# Altium PCB RD15002_SingleSCT.PcbDoc
Units mil, origin at the board's own origin, x right, y up, seen from the top; angles counter-clockwise.
Board outline 2050 x 3175 mil, 2 copper layers (Top Layer, Bottom Layer); 201 components, 164 nets, 627 pads, 0 vias.
Unrouted connection lines stored in the file: 407.
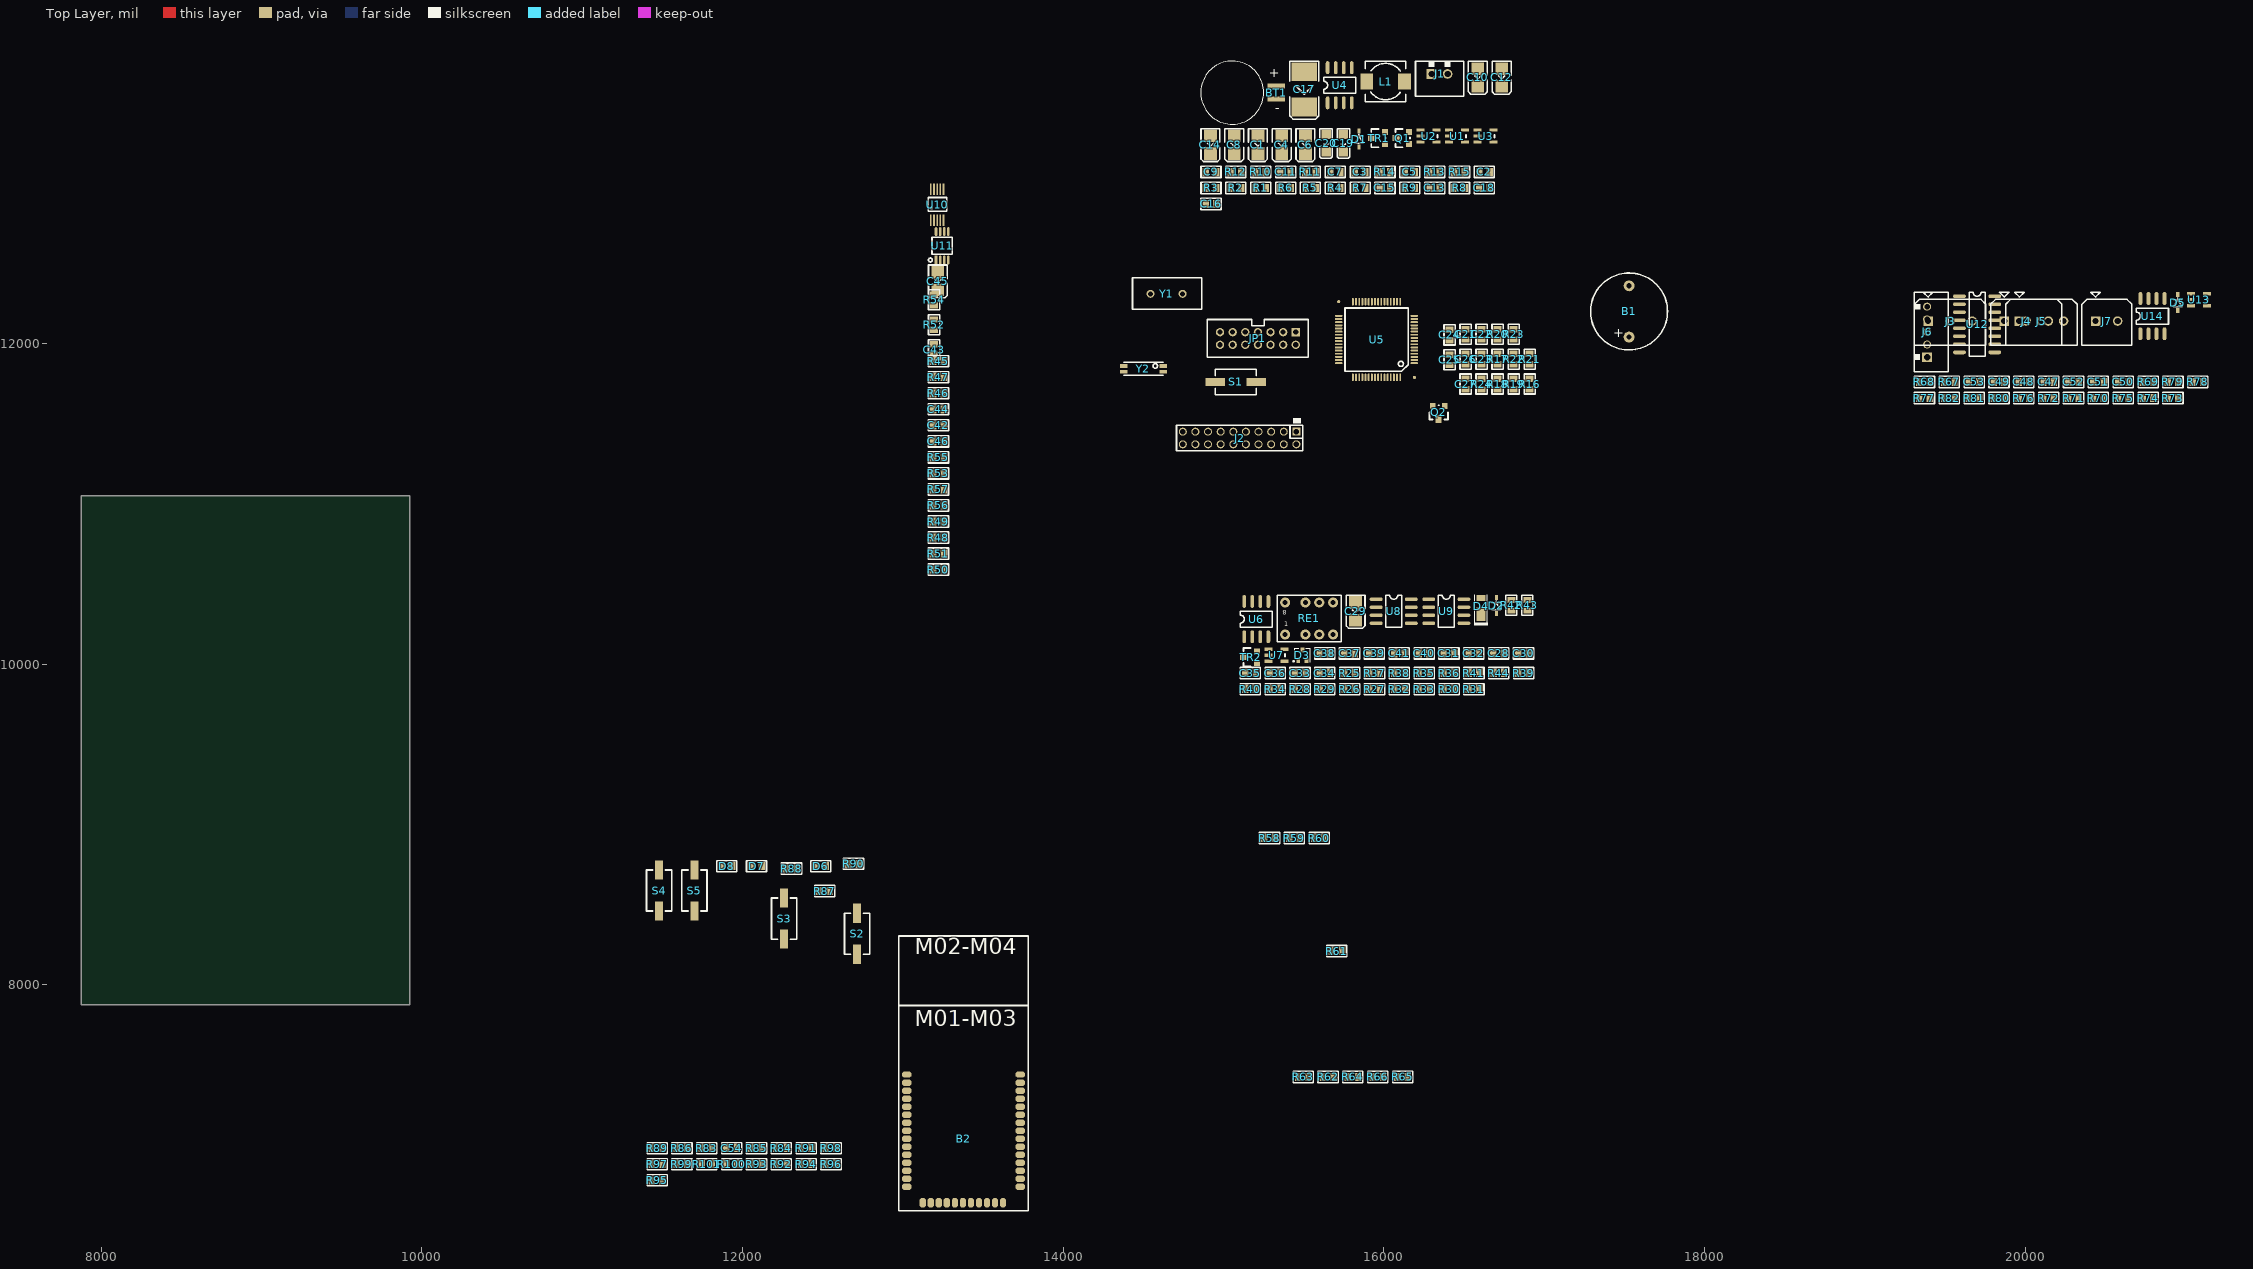
[diagram p0: Top Layer view]
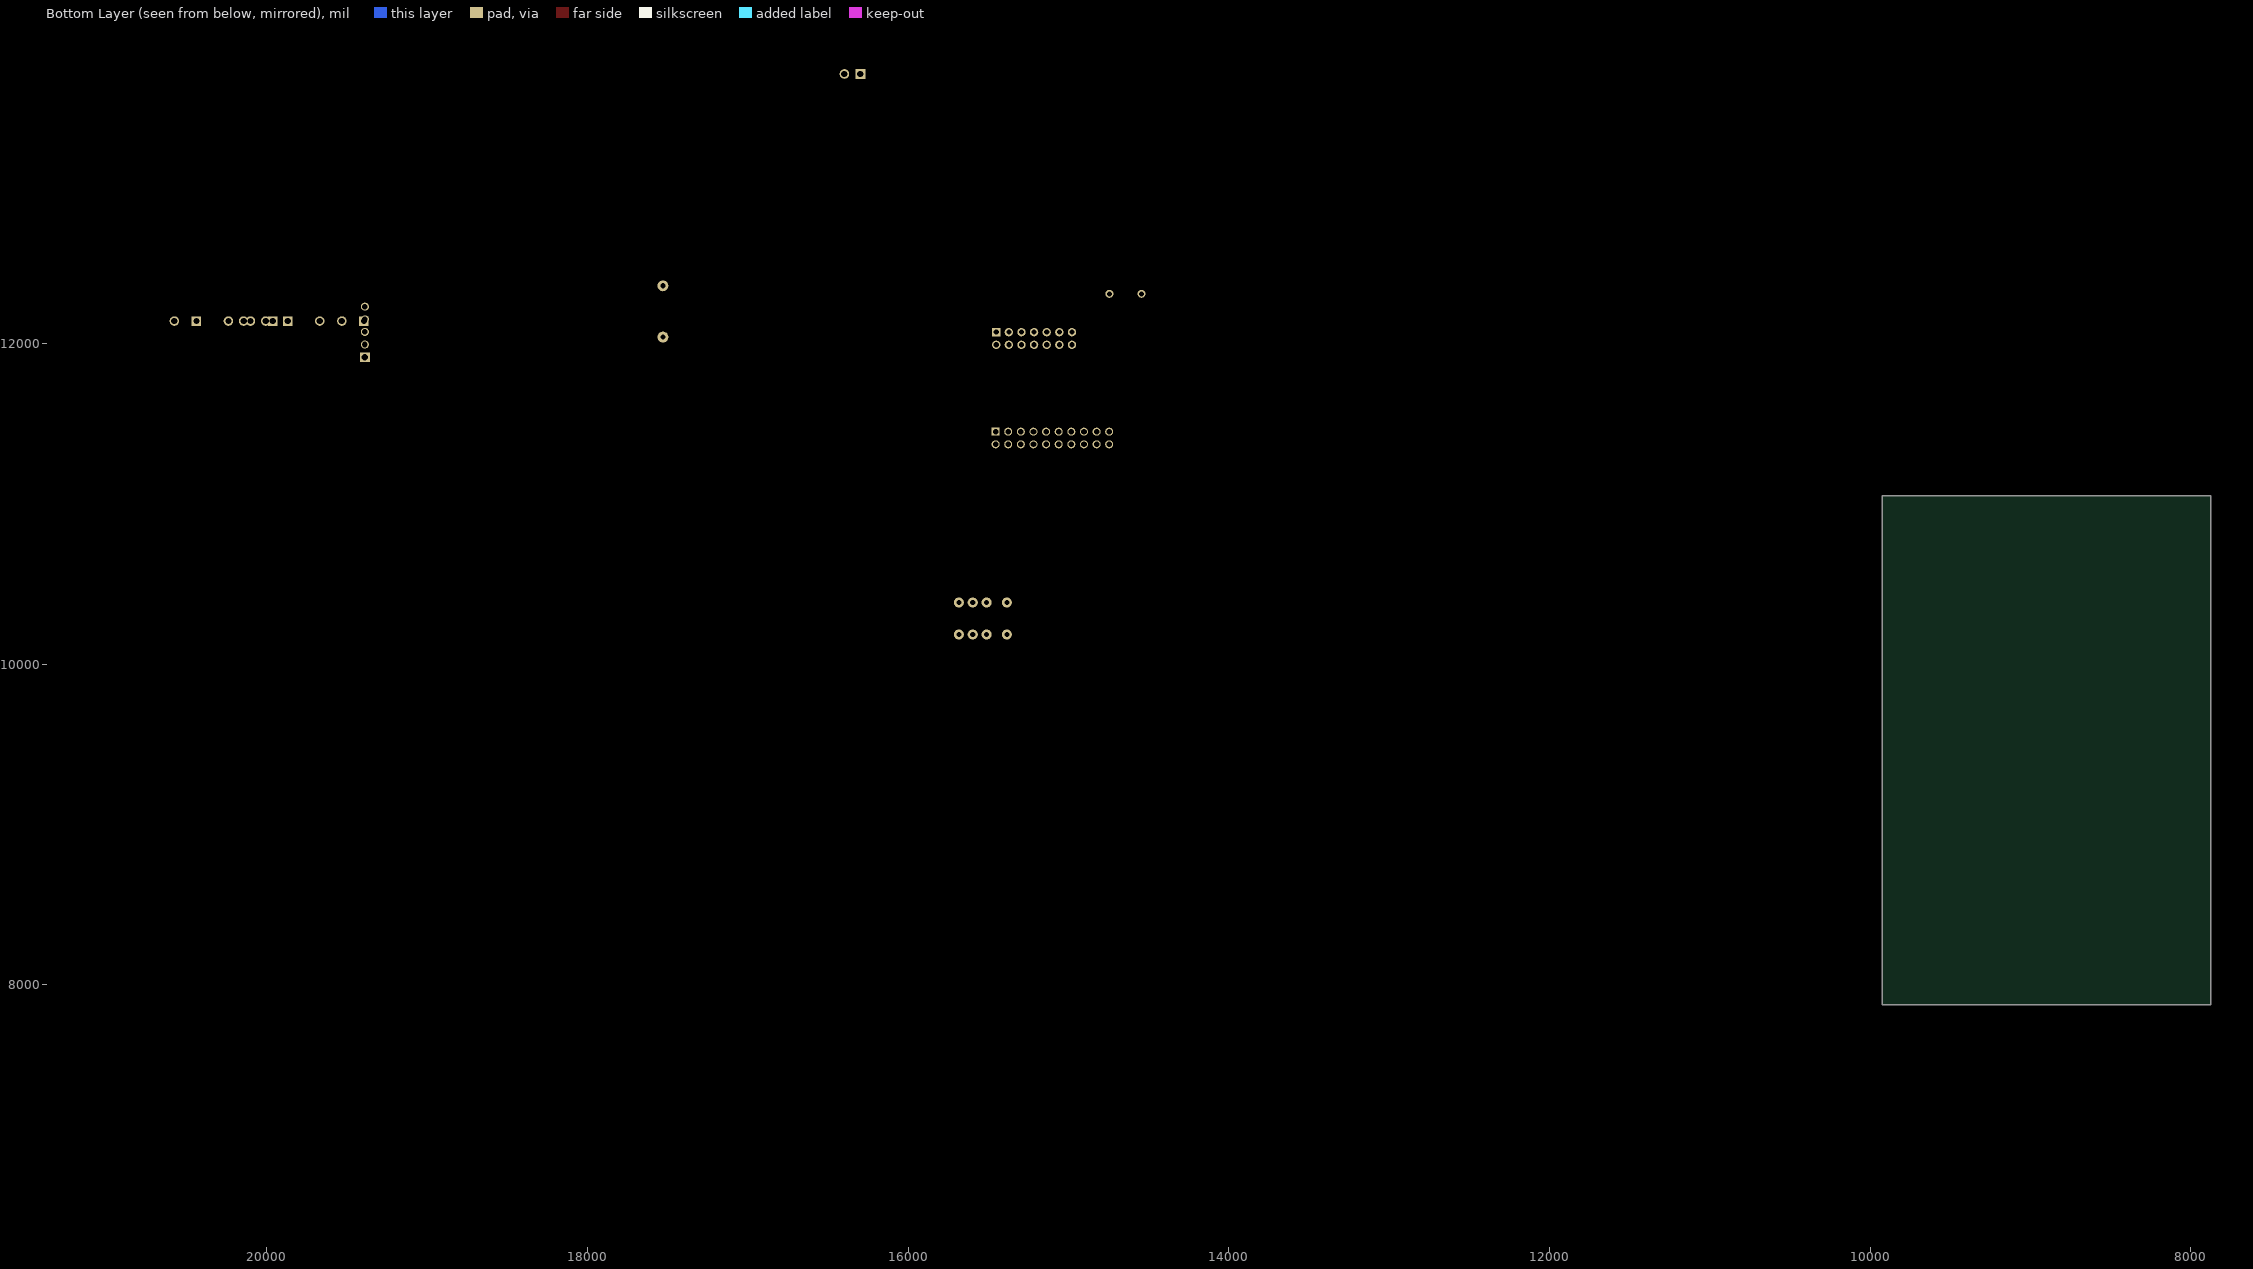
[diagram p1: Bottom Layer view, seen from below]

## Layer stack, top to bottom
Top Layer: signal copper 1.4
Dielectric: dielectric 12.6, FR-4, Dk 4.8
Bottom Layer: signal copper 1.4

## Board outline
7875,7875 9925,7875 9925,11050 7875,11050 7875,7875

## Design rules (kind name [scope] priority, off if disabled: settings)
Clearance [All] p1: gap=10
PolygonConnect [All] p1: connectstyle=Relief reliefconductorwidth=10 reliefentries=4 polygonreliefangle="90 Angle" airgapwidth=10
RoutingVias [All] p1: holewidth=28 width=50 viastyle="Through Hole" minholewidth=28 minwidth=50 maxholewidth=28 maxwidth=50
SolderMaskExpansion [All] p1: expansion=4
Width [All] p1: maxlimit=10 minlimit=10 preferedwidth=10
28 further rules are at their usual default settings.

## Classes and differential pairs
component class U_9-ZIGBEE: B2 C54 D6 D7 D8 R83 R84 R85 R86 R87 R88 R89 R90 R91 R92 R93 R94 R95 R96 R97 R98 R99 R100 R101 S2 S3 S4 S5
component class U_8-PORT: C47 C48 C49 C50 C51 C52 C53 D5 J3 J4 J5 J6 J7 R67 R68 R69 R70 R71 R72 R73 R74 R75 R76 R77 R78 R79 R80 R81 R82 U12 U13 U14
component class U_7-RES_CHECK: R62 R63 R64 R65 R66
component class U_6-CURRENT_CHECK: R61
component class U_5-VOL_CHECK: R58 R59 R60
component class U_4-ADC: C42 C43 C44 C45 C46 R45 R46 R47 R48 R49 R50 R51 R52 R53 R54 R55 R56 R57 U10 U11
component class U_3-VW_MODULE: C28 C29 C30 C31 C32 C33 C34 C35 C36 C37 C38 C39 C40 C41 D2 D3 D4 R25 R26 R27 R28 R29 R30 R31 R32 R33 R34 R35 R36 R37 R38 R39 R40 R41 R42 R43 R44 RE1 TR2 U6 U7 U8 U9
component class U_2-MCU: B1 C21 C22 C23 C24 C25 C26 C27 J2 JP1 Q2 R16 R17 R18 R19 R20 R21 R22 R23 R24 S1 U5 Y1 Y2
component class U_1-POWER: BT1 C1 C2 C3 C4 C5 C6 C7 C8 C9 C10 C11 C12 C13 C14 C15 C16 C17 C18 C19 C20 D1 J1 L1 Q1 R1 R2 R3 R4 R5 R6 R7 R8 R9 R10 R11 R12 R13 R14 R15 TR1 U1 U2 U3 U4

## Components (designator, comment, footprint, x,y, rotation, side; value= is the part's Value field where it differs from the comment)
B1 "BEEP" BUZZER-5V 17530,12040 r90 top
B2 "JN5139" JN5139 13025,7440 r0 top
BT1 "MS920T" MS920T 15329.85,13605.15 r0 top
C1 "22uF/16V" CB3528 15215.28,13185.3 r90 top
C2 "0.1uF" CC0603 16595,13070.3 r0 top
C3 "100pF" CC0603 15820,13070.3 r0 top
C4 "22uF/16V" CB3528 15363.39,13185.3 r90 top
C5 "0.1uF" CC0603 16130,13070.3 r0 top
C6 "22uF/16V" CB3528 15511.5,13185.3 r90 top
C7 "0.1uF" CC0603 15665,13070.3 r0 top
C8 "22uF/16V" CB3528 15067.17,13185.3 r90 top
C9 "0.1uF" CC0603 14890,13070.3 r0 top
C10 "22uF/16V" CB3528 16587.09,13605 r90 top
C11 "0.1uF" CC0603 15355,13070.3 r0 top
C12 "22uF/16V" CB3528 16735.2,13605 r90 top
C13 "0.1uF" CC0603 16285,12970.3 r0 top
C14 "22uF/16V" CB3528 14919.06,13185.3 r90 top
C15 "0.1uF" CC0603 15975,12970.3 r0 top
C16 "0.1uF" CC0603 14890,12870.3 r0 top
C17 "100uF/20V" CD7343 15504.52,13475 r90 top
C18 "0.1uF" CC0603 16595,12970.3 r0 top
C19 "4.7uF/10V" CA3216 15748.66,13195.3 r90 top
C20 "10uF/16V" CA3216 15639.92,13195.3 r90 top
C21 "22pF" CC0603 16510.4,12025 r90 top
C22 "22pF" CC0603 16610.4,12025 r90 top
C23 "22pF" CC0603 16610.4,11870 r90 top
C24 "22pF" CC0603 16410.4,12020.99 r90 top
C25 "0.1uF" CC0603 16410.4,11865.99 r90 top
C26 "0.1uF" CC0603 16510.4,11870 r90 top
C27 "1uF" CC0603 16510.4,11715 r90 top
C28 "0.1uF" CC0603 16684.1,10067 r0 top
C29 "22uF/16V" CB3528 15824.06,10275 r90 top
C30 "0.1uF" CC0603 16839.1,10067 r0 top
C31 "100pF" CC0603 16374.1,10067 r0 top
C32 "100pF" CC0603 16529.1,10067 r0 top
C33 "100pF" CC0603 15445,9944 r0 top
C34 "0.1uF" CC0603 15600,9944 r0 top
C35 "0.1uF" CC0603 15135,9944 r0 top
C36 "0.1uF" CC0603 15290,9944 r0 top
C37 "0.1uF" CC0603 15754.1,10067 r0 top
C38 "0.1uF" CC0603 15599.1,10067 r0 top
C39 "0.1uF" CC0603 15909.1,10067 r0 top
C40 "1uF" CC0603 16219.1,10067 r0 top
C41 "1uF" CC0603 16064.1,10067 r0 top
C42 "0.1uF" CC0603 13190,11489.72 r0 top
C43 "1000pF" CC0603 13195,11929.72 r90 top
C44 "0.1uF" CC0603 13190,11589.72 r0 top
C45 "22uF/16V" CB3528 13219.06,12334.72 r90 top
C46 "0.1uF" CC0603 13190,11389.72 r0 top
C47 "0.1uF" CC0603 20115,11760 r0 top
C48 "0.1uF" CC0603 19960,11760 r0 top
C49 "0.1uF" CC0603 19805,11760 r0 top
C50 "0.1uF" CC0603 20580,11760 r0 top
C51 "0.1uF" CC0603 20425,11760 r0 top
C52 "Cap" CC0603 20270,11760 r0 top
C53 "100pF" CC0603 19650,11760 r0 top
C54 "1uF" CC0603 11900,6980.83 r0 top
D1 "CMDSH-3" SOD323 15845.59,13225.55 r90 top
D2 "CMDSH-3" SOD323 16702.67,10315.25 r90 top
D3 "DESD1P0RFW-7" SOT-323 15492.6,10055.76 r90 top
D4 "DFLS1200-7" powerDI123 16607.11,10362.25 r90 top
D5 "1N4148" SOD323 20952.3,12205.25 r90 top
D6 "LED" CC0603 12455,8740 r0 top
D7 "LED" CC0603 12055,8740 r0 top
D8 "LED" CC0603 11870,8740 r0 top
J1 "BAT" CON2-2.54MM 16298.03,13681.26 r0 top
J2 "Header2*10" IDC20-2.0MM 15455,11450 r180 top
J3 "COM2" ECH350H-3P 19395,12140 r0 top
J4 "COM2" ECH350H-3P 19870,12140 r0 top
J5 "COM3" ECH350H-3P 19964.74,12140 r0 top
J6 "CON5" CON5-2.0MM 19388.74,11915 r90 top
J7 "CON2" ECH350H-2P 20439.74,12140 r0 top
JP1 "JTAG" IDC14-2.0MM 15451.18,12070.85 r180 top
L1 "10uH" SLF6025 15893.44,13634.02 r0 top
Q1 "CJ2301" SOT-23W 16158.14,13244.32 r90 top
Q2 "MMBT3904" SOT-23W 16380,11610 r180 top
R1 "105K" CC0603 15200,12970.3 r0 top
R2 "100K" CC0603 15045,12970.3 r0 top
R3 "20K" CC0603 14890,12970.3 r0 top
R4 "300K" CC0603 15665,12970.3 r0 top
R5 "22R" CC0603 15510,12970.3 r0 top
R6 "100R" CC0603 15355,12970.3 r0 top
R7 "100K" CC0603 15820,12970.3 r0 top
R8 "100K" CC0603 16440,12970.3 r0 top
R9 "100K" CC0603 16130,12970.3 r0 top
R10 "357R" CC0603 15200,13070.3 r0 top
R11 "10K" CC0603 15510,13070.3 r0 top
R12 "10K" CC0603 15045,13070.3 r0 top
R13 "0R" CC0603 16285,13070.3 r0 top
R14 "10K" CC0603 15975,13070.3 r0 top
R15 "100K" CC0603 16440,13070.3 r0 top
R16 "22R" CC0603 16910.4,11715 r90 top
R17 "22R" CC0603 16710.4,11870 r90 top
R18 "22R" CC0603 16710.4,11715 r90 top
R19 "22R" CC0603 16810.4,11715 r90 top
R20 "0R" CC0603 16710.4,12025 r90 top
R21 "0R" CC0603 16910.4,11870 r90 top
R22 "470" CC0603 16810.4,11870 r90 top
R23 "1K" CC0603 16810.4,12025 r90 top
R24 "10K" CC0603 16610.4,11715 r90 top
R25 "10K" CC0603 15755,9944 r0 top
R26 "100K" CC0603 15755,9844 r0 top
R27 "100K" CC0603 15910,9844 r0 top
R28 "1K" CC0603 15445,9844 r0 top
R29 "100K" CC0603 15600,9844 r0 top
R30 "100K" CC0603 16375,9844 r0 top
R31 "100K" CC0603 16530,9844 r0 top
R32 "100K" CC0603 16065,9844 r0 top
R33 "4.7K" CC0603 16220,9844 r0 top
R34 "4.7K" CC0603 15290,9844 r0 top
R35 "4.7K" CC0603 16220,9944 r0 top
R36 "0R" CC0603 16375,9944 r0 top
R37 "0R" CC0603 15910,9944 r0 top
R38 "0R" CC0603 16065,9944 r0 top
R39 "1K" CC0603 16840,9944 r0 top
R40 "10K" CC0603 15135,9844 r0 top
R41 "100K" CC0603 16530,9944 r0 top
R42 "100K 1%" CC0603 16795.23,10335 r90 top
R43 "100K 1%" CC0603 16895.23,10335 r90 top
R44 "1K" CC0603 16685,9944 r0 top
R45 "0R" CC0603 13190,11889.72 r0 top
R46 "12K" CC0603 13190,11689.72 r0 top
R47 "0R" CC0603 13190,11789.72 r0 top
R48 "0R" CC0603 13190,10789.72 r0 top
R49 "25R" CC0603 13190,10889.72 r0 top
R50 "5K" CC0603 13190,10589.72 r0 top
R51 "0R" CC0603 13190,10689.72 r0 top
R52 "92.6K 1%" CC0603 13195,12084.72 r90 top
R53 "0R" CC0603 13190,11189.72 r0 top
R54 "2.49K 1%" CC0603 13195,12239.72 r90 top
R55 "25R" CC0603 13190,11289.72 r0 top
R56 "0R" CC0603 13190,10989.72 r0 top
R57 "5K" CC0603 13190,11089.72 r0 top
R58 "10K" CC0603 15255,8915 r0 top
R59 "10K" CC0603 15410,8915 r0 top
R60 "10K" CC0603 15565,8915 r0 top
R61 "100R" CC0603 15675,8210 r0 top
R62 "1K" CC0603 15620,7425 r0 top
R63 "0R" CC0603 15465,7425 r0 top
R64 "1K" CC0603 15775,7425 r0 top
R65 "1K" CC0603 16085,7425 r0 top
R66 "0R" CC0603 15930,7425 r0 top
R67 "0R" CC0603 19495,11760 r0 top
R68 "0R" CC0603 19340,11760 r0 top
R69 "0R" CC0603 20735,11760 r0 top
R70 "0R" CC0603 20425,11660 r0 top
R71 "0R" CC0603 20270,11660 r0 top
R72 "0R" CC0603 20115,11660 r0 top
R73 "0R" CC0603 20890,11660 r0 top
R74 "0R" CC0603 20735,11660 r0 top
R75 "0R" CC0603 20580,11660 r0 top
R76 "0R" CC0603 19960,11660 r0 top
R77 "10K" CC0603 19340,11660 r0 top
R78 "10K" CC0603 21045,11760 r0 top
R79 "0R" CC0603 20890,11760 r0 top
R80 "0R" CC0603 19805,11660 r0 top
R81 "120R" CC0603 19650,11660 r0 top
R82 "10K" CC0603 19495,11660 r0 top
R83 "200R" CC0603 11745,6980.83 r0 top
R84 "2.2K" CC0603 12210,6980.83 r0 top
R85 "200R" CC0603 12055,6980.83 r0 top
R86 "2.2K" CC0603 11590,6980.83 r0 top
R87 "200R" CC0603 12480,8585 r0 top
R88 "0R" CC0603 12273.66,8725 r0 top
R89 "0R" CC0603 11435,6980.83 r0 top
R90 "2.2K" CC0603 12660,8755 r0 top
R91 "0R" CC0603 12365,6980.83 r0 top
R92 "0R" CC0603 12210,6880.83 r0 top
R93 "0R" CC0603 12055,6880.83 r0 top
R94 "10K" CC0603 12365,6880.83 r0 top
R95 "10K" CC0603 11435,6780.83 r0 top
R96 "2.2K" CC0603 12520,6880.83 r0 top
R97 "2.2K" CC0603 11435,6880.83 r0 top
R98 "0R" CC0603 12520,6980.83 r0 top
R99 "0R" CC0603 11590,6880.83 r0 top
R100 "0R" CC0603 11900,6880.83 r0 top
R101 "0R" CC0603 11745,6880.83 r0 top
RE1 "G6K" G6K 15385,10185 r0 top
S1 "RESET" SPST 15205,11760 r180 top
S2 "SW-PB" SPST 12715,8190 r90 top
S3 "SW-PB" SPST 12260,8285 r90 top
S4 "SW-PB" SPST 11480,8460 r90 top
S5 "SW-PB" SPST 11700,8460 r90 top
TR1 "MMBT3904" SOT-23W 16007.15,13244.32 r90 top
TR2 "MMBT3904" SOT-23W 15209,10006.02 r90 top
U1 "TPS560200" SOT-23-5 16407.13,13331.3 r90 top
U2 "LP2985-25" SOT-23-5 16229.13,13331.3 r90 top
U3 "LP2985-25" SOT-23-5 16585.13,13331.3 r90 top
U4 "LT1019AIS8-5" SO-8 15650.07,13501 r90 top
U5 "MSP430F1X/2X/4X" LQFP64 15955,12025 r180 top
U6 "FAN3122" SO-8 15130,10171 r90 top
U7 "TLV3491AID" SOT-23-5 15279.99,10093 r90 top
U8 "LT1807" SO-8 15952.11,10405 r0 top
U9 "LT1807" SO-8 16280.11,10405 r0 top
U10 "LTC2402" MS10 13175,12770 r0 top
U11 "AD8420" MSOP8 13207.21,12520.99 r90 top
U12 "MAX3232" SO-16 19590.74,12295 r0 top
U13 "74HC1G14" SOT-23-5 21033.86,12311 r90 top
U14 "SN65HVD72/75/78" SO-8 20719.74,12061 r90 top
Y1 "1M" XCYAI 14645,12310 r180 top
Y2 "32.768KHz" MC-146 14625,11860 r180 top

## Footprints (in the part's own frame and the unit in brackets; to place one, negate y for a bottom-side part, rotate by r counter-clockwise, add the part's x,y. Pads: shape width x height; smd on the part's side, far side on the other; paste and mask are expansions set on the pad)
BUZZER-5V [mil] "BUZZER"
  round 68 hole 32: 1(0,0) 2(320,0)
  silkscreen extent -80,-240 400,240
CA3216 [mm] "A type Tantalum Capacitor L3.2mm*W1.6mm"
  rect 1.5x1.5 smd: 1(0,0) 2(2.794,0)
  silkscreen extent -1.02,-1 3.68,1
CB3528 [mm] "B type Tantalum Capacitor L3.5mm*W2.8mm"
  rect 2x2 smd: 1(0,0) 2(2.794,0)
  silkscreen extent -1.27,-1.5 3.94,1.5
CC0603 [mil]
  rect 40x50 smd: 1(0,0) 2(65,0)
  silkscreen extent -30,-35 95,35
CD7343 [mm] "Capacitor"
  rect 3x4 smd: 1(0,0) 2(5.588,0)
  silkscreen extent -1.91,-2.3 7.24,2.3
CON2-2.54MM [mil]
  rect 60x60 hole 40: 1(0,0)
  round 60 hole 40: 2(100,0)
  silkscreen extent -100,-138 200,79
CON5-2.0MM [mil]
  rect 60x60 hole 40: 1(0,0)
  round 50 hole 35 paste+0: 2(78.74,0) 3(157.48,0) 4(236.22,0) 5(314.96,0)
  silkscreen extent -90,-133 405,79
ECH350H-2P [mm]
  rect 1.5x1.5 hole 1: 1(0,0)
  round 1.5 hole 1: 2(3.5,0)
  silkscreen extent -2.16,-3.81 5.71,4.57
ECH350H-3P [mm]
  rect 1.5x1.5 hole 1: 1(0,0)
  round 1.5 hole 1: 2(3.5,0) 3(7,0)
  silkscreen extent -2.16,-3.81 9.14,4.57
G6K [mm]
  round 1.6 hole 0.8: 1(0,0) 2(3.2,0) 3(5.4,0) 4(7.6,0) 5(7.6,5.08) 6(5.4,5.08) 7(3.2,5.08) 8(0,5.08)
  silkscreen extent -1.27,-1.14 8.89,6.22
IDC14-2.0MM [mil]
  rect 52x52 hole 32: 1(0,0)
  round 52 hole 32: 2(0,78.74) 3(78.74,0) 4(78.74,78.74) 5(157.48,0) 6(157.48,78.74) 7(236.22,0) 8(236.22,78.74) 9(314.96,0) 10(314.96,78.74) 11(393.7,0) 12(393.7,78.74) 13(472.44,0) 14(472.44,78.74)
  silkscreen extent -79,-79 551,157
IDC20-2.0MM [mm]
  rect 1.27x1.27 hole 0.889: 1(0,0)
  round 1.27 hole 0.889: 2(0,2) 3(2,0) 4(2,2) 5(4,0) 6(4,2) 7(6,0) 8(6,2) 9(8,0) 10(8,2) 11(10,0) 12(10,2) 13(12,0) 14(12,2) 15(14,0) 16(14,2) 17(16,0) 18(16,2) 19(18,0) 20(18,2)
  silkscreen extent -1.03,-2.17 19,3
JN5139 [mm]
  oct 1.5x1 smd: 1(0,0) 2(0,-1.27) 3(0,-2.54) 4(0,-3.81) 5(0,-5.08) 6(0,-6.35) 7(0,-7.62) 8(0,-8.89) 9(0,-10.16) 10(0,-11.43) 11(0,-12.7) 12(0,-13.97) 13(0,-15.24) 14(0,-16.51) 15(0,-17.78) 27(18,-17.78) 28(18,-16.51) 29(18,-15.24) 30(18,-13.97) 31(18,-12.7) 32(18,-11.43) 33(18,-10.16) 34(18,-8.89) 35(18,-7.62) 36(18,-6.35) 37(18,-5.08) 38(18,-3.81) 39(18,-2.54) 40(18,-1.27) 41(18,0)
  oct 1x1.5 smd: 16(2.54,-20.32) 17(3.81,-20.32) 18(5.08,-20.32) 19(6.35,-20.32) 20(7.62,-20.32) 21(8.89,-20.32) 22(10.16,-20.32) 23(11.43,-20.32) 24(12.7,-20.32) 25(13.97,-20.32) 26(15.24,-20.32)
  silkscreen extent -1.27,-21.59 19.27,21.95
LQFP64 [mm]
  oval 1.2x0.3 smd: 1(-6,3.75) 2(-6,3.25) 3(-6,2.75) 4(-6,2.25) 5(-6,1.75) 6(-6,1.25) 7(-6,0.75) 8(-6,0.25) 9(-6,-0.25) 10(-6,-0.75) 11(-6,-1.25) 12(-6,-1.75) 13(-6,-2.25) 14(-6,-2.75) 15(-6,-3.25) 16(-6,-3.75) 33(6,-3.75) 34(6,-3.25) 35(6,-2.75) 36(6,-2.25) 37(6,-1.75) 38(6,-1.25) 39(6,-0.75) 40(6,-0.25) 41(6,0.25) 42(6,0.75) 43(6,1.25) 44(6,1.75) 45(6,2.25) 46(6,2.75) 47(6,3.25) 48(6,3.75)
  oval 0.3x1.2 smd: 17(-3.75,-6) 18(-3.25,-6) 19(-2.75,-6) 20(-2.25,-6) 21(-1.75,-6) 22(-1.25,-6) 23(-0.75,-6) 24(-0.25,-6) 25(0.25,-6) 26(0.75,-6) 27(1.25,-6) 28(1.75,-6) 29(2.25,-6) 30(2.75,-6) 31(3.25,-6) 32(3.75,-6) 49(3.75,6) 50(3.25,6) 51(2.75,6) 52(2.25,6) 53(1.75,6) 54(1.25,6) 55(0.75,6) 56(0.25,6) 57(-0.25,6) 58(-0.75,6) 59(-1.25,6) 60(-1.75,6) 61(-2.25,6) 62(-2.75,6) 63(-3.25,6) 64(-3.75,6)
  round 0.5 smd: ""(-6,6) ""(6,-6)
  silkscreen extent -5,-5 5,5
MC-146 [mm]
  rect 1.2x0.6 smd: 1(0,0) 2(6.3,0) 3(6.3,0.9) 4(0,0.9)
  silkscreen extent 0,-0.6 6.3,1.5
MS10 [mm] "MS10"
  rect 0.254x1.8 smd: 1(0,0) 2(0.5,0) 3(1,0) 4(1.5,0) 5(2,0) 6(2,4.88) 7(1.5,4.88) 8(1,4.88) 9(0.5,4.88) 10(0,4.88)
  silkscreen extent -0.4,1.38 2.5,3.58
MS920T [mm]
  rect 2.8x0.8 smd: 1(0,0) 2(0,-2.032)
  silkscreen extent -11.98,-6.02 -1.98,3.98
MSOP8 [mm]
  rect 1.4x0.42 smd: 1(0,0)
  oval 1.4x0.42 smd: 2(0,-0.65) 3(0,-1.3) 4(0,-1.95) 5(4.5,-1.95) 6(4.5,-1.3) 7(4.5,-0.65) 8(4.5,0)
  silkscreen extent -0.31,-2.54 3.61,1.2
powerDI123 [mm]
  rect 2.2x1.4 smd: 1(-1.275,0)
  rect 0.9x1.4 smd: 2(1.275,0)
  silkscreen extent -3.1,-1.09 1.76,1.09
SLF6025 [mm]
  rect 2x2.5 smd: 1(0,0) 2(6,0)
  silkscreen extent -0.2,-3.2 6.2,3.2
SO-8 [mil] "SO8"
  oval 80x24 smd: 1(0,0) 2(0,-50) 3(0,-100) 4(0,-150) 5(220,-150) 6(220,-100) 7(220,-50) 8(220,0)
  silkscreen extent 60,-175 160,25
SO-16 [mil] "SO16"
  oval 80x24 smd: 1(0,0) 2(0,-50) 3(0,-100) 4(0,-150) 5(0,-200) 6(0,-250) 7(0,-300) 8(0,-350) 9(220,-350) 10(220,-300) 11(220,-250) 12(220,-200) 13(220,-150) 14(220,-100) 15(220,-50) 16(220,0)
  silkscreen extent 60,-375 160,25
SOD323 [mm]
  rect 0.8x0.5 smd: 1(0,0) 2(2.54,0)
  silkscreen extent 0.61,-0.7 2.01,0.7
SOT-23-5 [mil] "SOT23-5"
  rect 20x50 smd: 1(0,0) 2(-37,0) 3(-75,0) 4(-75,-100) 5(0,-100)
  silkscreen extent -45,-105 -30,-105
SOT-23W [mil]
  rect 35.98x35.98 smd: 1(0,0) 2(75,0)
  rect 35.98x50 smd: 3(37.99,80)
  silkscreen extent -20,-5 95,85
SOT-323 [mm]
  rect 0.8x0.6 smd: 1(-0.8,0.65) 2(-0.8,-0.65) 3(0.8,0)
  silkscreen extent -1.14,-1.22 1.09,1.49
SPST [mil]
  rect 120x50 smd: 1(0,0) 2(256,0)
  silkscreen extent 0,-79 256,79
XCYAI [mil]
  round 50 hole 32: 1(-100,0) 2(100,0)
  silkscreen extent -220,-100 212,97

## Part data
BT1: library part Battery, "Multicell Battery"
C1 C4 C6 C8 C10 C12 C14 C19 C20 C29 C45: library part "Cap Pol1", "Polarized Capacitor (Radial)"
C2 C3 C5 C7 C9 C11 C13 C15 C16 C18 C21 C22 C23 C24 C25 C26 C27 C28 C30 C31 C32 C33 C34 C35 C36 C37 C38 C39 C40 C41 C42 C43 C44 C46 C47 C48 C49 C50 C51 C53 C54: library part Cap, "Capacitor"
C17: library part "Cap Pol3", "Polarized Capacitor (Surface Mount)"
C52: "Capacitor"
D1 D2: library part "D Schottky", "Schottky Diode"
D3: library part BAV99WT1G, "TVS DIODE,70VVVM,8VC,SOT-323"
D4: "Diode, Schotky, 200V, 1A, PowerDI123"
D5: library part DIODE
J1 J7: library part SIP2, "jointbar"
J3 J4 J5: library part SIP3, "jointbar"
J6: library part "Header 5", "Header, 5-Pin"
JP1: library part Header2*7
L1: library part Inductor, "Inductor"
Q1: library part P-MOSFET1
Q2 TR1 TR2: library part NPN
R1 R2 R3 R4 R5 R6 R7 R8 R9 R10 R11 R12 R13 R14 R15 R16 R17 R18 R19 R20 R21 R22 R23 R24 R25 R26 R27 R28 R29 R30 R31 R32 R33 R34 R35 R36 R37 R38 R39 R40 R41 R42 R43 R44 R45 R46 R47 R48 R49 R50 R51 R52 R53 R54 R55 R56 R57 R58 R59 R60 R61 R62 R63 R64 R65 R66 R67 R68 R69 R70 R71 R72 R73 R74 R75 R76 R77 R78 R79 R80 R81 R82 R83 R84 R85 R86 R87 R88 R89 R90 R91 R92 R93 R94 R95 R96 R97 R98 R99 R100 R101: library part Res2, "Resistor"
S1: library part SW-PB, "Switch"
S2 S3 S4 S5: "Switch"
U2 U3: library part LP2985
U8 U9: library part LM833N
U12: "communication  IC"
Y1: library part XTAL, "Crystal Oscillator"
Y2: library part MC-146

## Nets (pads, with @x,y where several pads share a name; then routed paths per layer and width w, separated by ;. In a path a pad name is that pad's centre, name@x,y a point inside that pad or via, vN(x,y) a via of type N, cw(c..) or ccw(c..) an arc to the next point about the centre after c; other vN are vias at no path point)
+3V: C8.1 C9.2 D1.1 U2.5
+3V_MCU: BT1.1 C10.1 C25.2 C26.2 JP1.2 R5.1 R6.2 R16.2 R24.2 U5.1
+3V_ZIGBEE: B2.24 C14.1 C15.2 C48.2 C49.2 R77.2 R78.1 R83.2 R84.1 R85.2 R86.1 R87.2 R90.1 R94.1 R95.1 R96.1 R97.1 U3.5 U12.16 U13.5 U14.8
+5V: C3.2 C4.1 C5.2 C6.1 C7.2 C12.1 C13.2 C28.1 C37.2 C38.2 C39.2 C40.2 C41.2 D2.2 D3.2 L1.2 R1.1 R22.2 R40.1 R41.1 R42.1 RE1.1 U2.1 U3.1 U7.5 U9.8
+5V_ADC: C42.2 C45.1 C46.2 R10.1 R13.2 R45.1 R46.1 R62.2 R63.2 U4.6 U10.1 U10.2 U11.5
+VIN: C17.1 C20.1 Q1.3 R10.2 U4.2
A: J5.1 R81.1 U14.6
AD_BAT: R4.2 R7.1 U5.59
AD_MCUVOL: R6.1 U5.60
ADC_IN+: R51.1 R58.2 R59.1 R61.1 R62.1 R64.1 R73.2
ADC_IN-: R53.1 R59.2 R60.1 R61.2 R66.2 R74.2
ADC_VOL: R48.1 R52.2 U11.8
AGND: C38.1 C39.1 C40.1 C41.1 D3.1 R43.2 R44.2 U9.4
B: J5.2 R81.2 U14.7
BAT+: C1.1 C2.2 C29.1 C30.2 J1.1 Q1.2 R4.1 R11.2 U1.4 U6.1 U6.8
BEEP: R23.2 U5.17
BLACK: J6.2 RE1.3
BLACK_R: R44.1 RE1.4
BLACK_T: R28.1 RE1.2
DGND: B2.25 B2.26 BT1.2 C1.2 C2.1 C4.2 C5.1 C6.2 C7.1 C8.2 C9.1 C10.2 C11.1 C12.2 C13.1 C14.2 C15.1 C16.1 C18.1 C19.2 C20.2 C21.1 C22.1 C23.2 C24.2 C25.1 C26.1 C27.1 C28.2 C29.2 C30.1 C37.1 C42.1 C43.1 C44.1 C45.2 C46.1 C49.1 C51.1 C52.1 C53.1 C54.1 D8.2 J1.2 J3.3 J4.3 J5.3 JP1.9 Q2.2 R2.2 R3.2 R7.2 R8.2 R9.2 R15.1 R26.1 R27.2 R28.2 R32.2 R47.2 R56.1 R64.2 R65.1 S1.1 S2.2 S3.2 S4.2 S5.2 TR1.2 TR2.2 U1.2 U2.2 U3.2 U4.4 U5.62 U5.63 U6.4 U6.5 U7.2 U10.6 U11.4 U12.15 U13.3 U14.5 Y2.2 Y2.3
DIO9: B2.21 R84.2 S2.1
DIO10: B2.22 R86.2 S3.1
DIO16: B2.32 D6.2
DRIVER_EN: R27.1 U6.3
GREEN: J6.4 R46.2 R48.2 R49.1
LT_RTD1: R55.1
MCUMISO: R18.1 U5.30
MCUMOSI: U5.29
MCURXD0: R68.2 U5.33
MCURXD1: R20.1 R72.2 R79.1 U5.35
MCUSCK: R17.1
MCUTXD0: R67.2 U5.32
MCUTXD1: R21.1 R70.2 R80.1 U5.34
NetB1_1: B1.1 R22.1
NetB1_2: B1.2 Q2.3
NetB2_9: B2.9 R90.2 R93.1
NetB2_13: B2.13 R93.2 R96.2
NetB2_14: B2.14 R97.2
NetB2_29: B2.29 C54.2 R94.2 S4.1
NetC3_1: C3.1 R1.2 R3.1 U1.5
NetC11_2: C11.2 U2.4
NetC16_2: C16.2 U3.4
NetC18_2: C18.2 C19.1 R13.1
NetC21_2: C21.2 U5.52 Y1.2
NetC22_2: C22.2 U5.53 Y1.1
NetC23_1: C23.1 U5.8 Y2.1
NetC24_1: C24.1 U5.9 Y2.4
NetC31_1: C31.1 C36.2 R29.1 U9.1
NetC31_2: C31.2 R29.2 R34.1 U9.2
NetC32_1: C32.1 C35.2 R30.1 U8.1
NetC32_2: C32.2 R30.2 R33.1 U8.2
NetC33_1: C33.1 D4.2 R31.1 U8.7
NetC33_2: C33.2 R31.2 R35.1 U8.6
NetC34_1: C34.1 D3.3 R33.2
NetC35_1: C35.1 R34.2
NetC36_1: C36.1 R35.2
NetC43_2: C43.2 R49.2 R50.1
NetC44_2: C44.2 R55.2 R57.1
NetC47_1: C47.1 U12.3
NetC47_2: C47.2 U12.1
NetC48_1: C48.1 U12.2
NetC50_1: C50.1 U12.5
NetC50_2: C50.2 U12.4
NetC51_2: C51.2 U12.6
NetC53_2: C53.2 D5.1 R82.2 U13.2
NetD1_2: D1.2 R5.2
NetD4_1: D4.1 R39.2
NetD5_2: D5.2 R77.1 R80.2 R82.1 U14.4
NetD6_1: D6.1 R83.1
NetD7_1: D7.1 R85.1
NetD8_1: D8.1 R87.1
NetJ7_1: J7.1 R69.1 R73.1 R75.1
NetJ7_2: J7.2 R71.1 R74.1 R76.1
NetL1_1: L1.1 U1.3
NetQ1_1: Q1.1 R11.1 R12.1
NetQ2_1: Q2.1 R23.1
NetR12_2: R12.2 TR1.3
NetR14_1: R14.1 R15.2 TR1.1
NetR16_1: R16.1 U5.64
NetR25_1: R25.1 R26.2 TR2.1
NetR32_1: R32.1 R41.2 U7.4
NetR36_1: R36.1 U8.3
NetR36_2: R36.2 U9.6
NetR37_1: R37.1 U9.3
NetR37_2: R37.2 R38.2 U9.7
NetR38_1: R38.1 U8.5
NetR39_1: R39.1 U7.3
NetR42_2: R42.2 R43.1 U9.5
NetR45_2: R45.2 R47.1 U10.10
NetR50_2: R50.2 U10.4
NetR51_2: R51.2 U11.2
NetR52_1: R52.1 R54.2 U11.7
NetR53_2: R53.2 U11.3
NetR54_1: R54.1 U11.6
NetR57_2: R57.2 U10.5
NetR67_1: R67.1 U12.11
NetR68_1: R68.1 U12.12
NetR70_1: R70.1 U12.10
NetR72_1: R72.1 U12.9
NetR78_2: R78.2 R79.2 U14.1
NetU13_4: U13.4 U14.2 U14.3
P2.4: J2.17 U5.24
P2.5: J2.18 U5.25
P2.6: J2.19 U5.26
P2.7: J2.20 U5.27
P3.0: R19.1 U5.28
P4.0: J2.2 U5.36
P4.2: J2.6 U5.38
P4.3: J2.8 U5.39
P4.4: J2.10 U5.40
P4.5: J2.12 U5.41
P4.6: J2.14 U5.42
P4.7: J2.16 U5.43
P5.0: J2.1 U5.44
P5.1: J2.3 U5.45
P5.2: J2.5 U5.46
P5.3: J2.7 U5.47
P5.4: J2.9 U5.48
P5.5: J2.11 U5.49
P5.6: J2.13 U5.50
P5.7: J2.15 U5.51
PWR_ADC: R14.2 U5.23
PWR_MAIN: R2.1 U1.1 U5.20
PWR_MCU: R8.1 U2.3 U5.21
PWR_ZIGBEE: R9.1 U3.3 U5.22
RED: J6.1 RE1.6
RED_R: C34.2 RE1.5
RED_T: RE1.7 U6.6 U6.7
RESET: C27.2 JP1.11 R24.1 S1.2 U5.58
RESISTOR+: R63.1 R75.2
RESISTOR-: R65.2 R66.1 R76.2
RS232RX0: J3.2 U12.13
RS232RX1: J4.2 U12.8
RS232TX0: J3.1 U12.14
RS232TX1: J4.1 U12.7
SCK: U5.31
SHIELD: C52.2 J6.3
SPI1_CS1: R19.2 U10.7
SPI1_MISO: R18.2 U10.8
SPI1_SCK: R17.2 U10.9
TCK: JP1.7 U5.57
TDI: JP1.3 U5.55
TDO: JP1.1 U5.54
TMS: JP1.5 U5.56
VOLTAGE+: R58.1 R69.2
VOLTAGE-: R60.2 R71.2
VW_DRIVE: U5.37 U6.2
VW_RE: R40.2 U5.13 U7.1
VW_TRCN: R25.2 U5.14
VWTRCN: D2.1 RE1.8 TR2.3
WHITE: J6.5 R56.2 U10.3
ZIGBEECTS: R92.1 R98.2
ZIGBEECTS0: B2.16 R98.1
ZIGBEECTS1: B2.33 D7.2 R92.2
ZIGBEEMISO: B2.7 R95.2 S5.1
ZIGBEERTS: R91.1 R99.2
ZIGBEERTS0: B2.17 R99.1
ZIGBEERTS1: B2.34 R91.2
ZIGBEERX: R21.2 R88.1 R101.2
ZIGBEERX0: B2.19 R101.1
ZIGBEERX1: B2.36 R88.2
ZIGBEETX: R20.2 R89.1 R100.2
ZIGBEETX0: B2.18 R100.1
ZIGBEETX1: B2.35 R89.2
pads on no net: B2.1 B2.2 B2.3 B2.4 B2.5 B2.6 B2.8 B2.10 B2.11 B2.12 B2.15 B2.20 B2.23 B2.27 B2.28 B2.30 B2.31 B2.37 B2.38 B2.39 B2.40 B2.41 C17.2 J2.4 JP1.4 JP1.6 JP1.8 JP1.10 JP1.12 JP1.13 JP1.14 U4.1 U4.3 U4.5 U4.7 U4.8 U5. U5.2 U5.3 U5.4 U5.5 U5.6 U5.7 U5.10 U5.11 U5.12 U5.15 U5.16 U5.18 U5.19 U5.61 U8.4 U8.8 U11.1 U13.1

## Silkscreen, mask and mechanical layers (free items; w line width, h text height)
Mechanical 1:
  lines w10: 7875,7875 9925,7875 9925,11050 7875,11050 7875,7880 7875,7875

## Text inside footprints (layer, text, board x,y; h text height)
B1: Top Overlay "+" at 17430,12040 h60
B2: Top Overlay "M01-M03" at 13075,7740 h100; Top Overlay "M02-M04" at 13075,8190 h100
BT1: Top Overlay "+" at 15349.85,13710.15 h60 r180; Top Overlay "-" at 15349.85,13485.15 h60 r180
RE1: Top Overlay "1" at 15380,10235 h30; Top Overlay "8" at 15395,10335 h30 r180